# EAGLE board ranback_top (EAGLE 9.6.2)
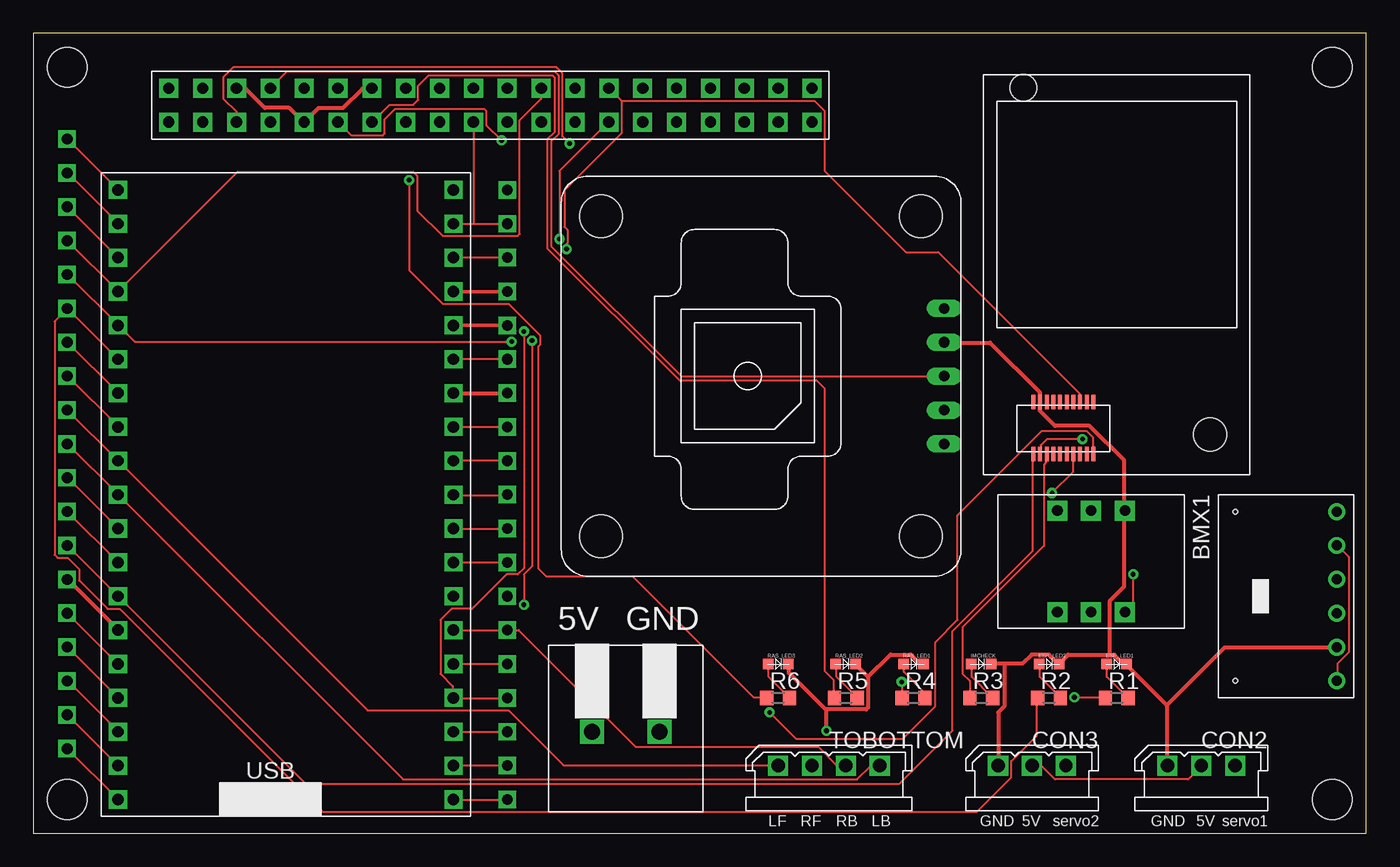
[diagram p0: board, top side]
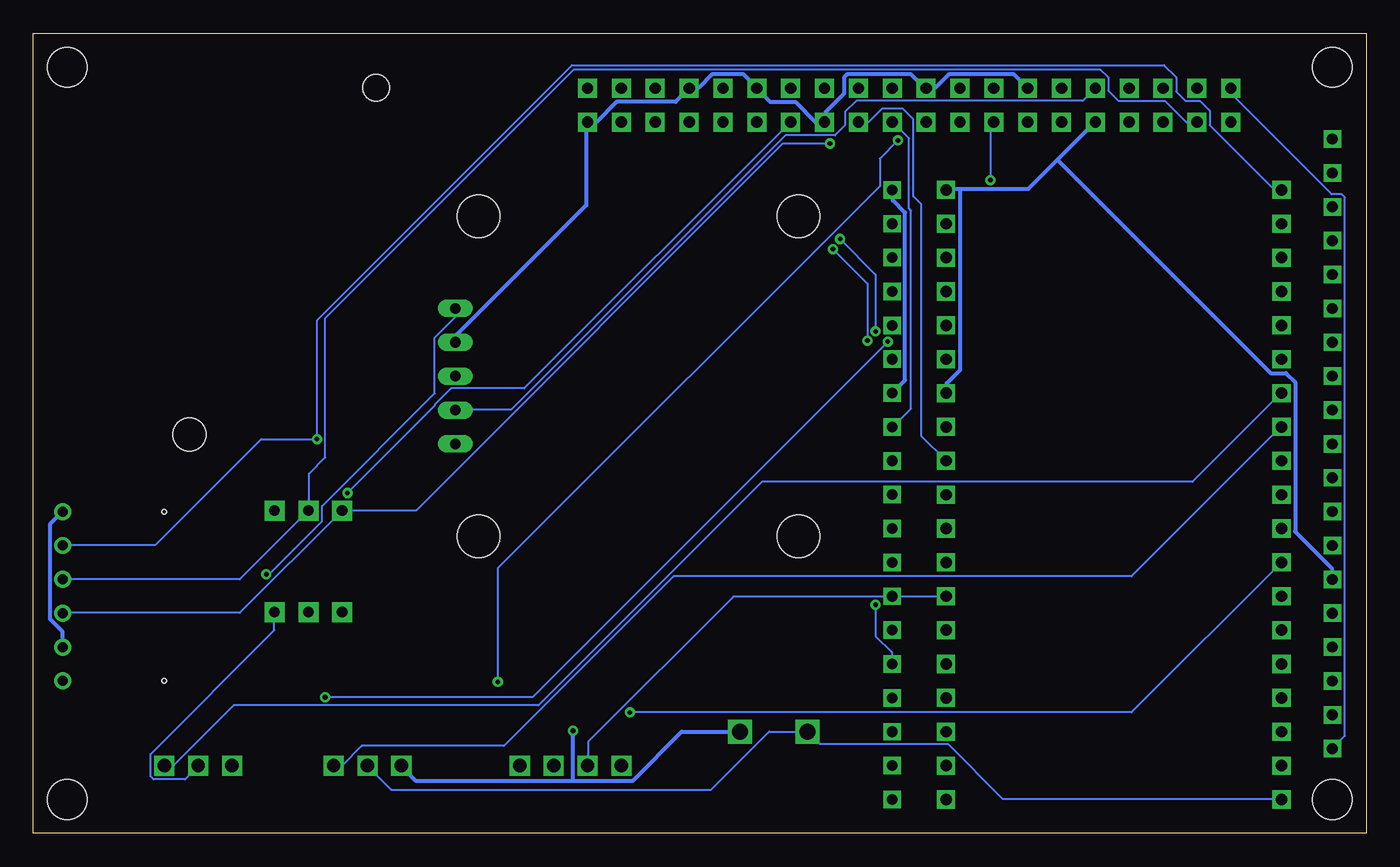
[diagram p1: board, bottom side, seen from below]

Size 100 x 60 mm. Coordinates in mm from the lower left corner, seen from the top.
Outline: 0,0 100,0 100,60 0,60 0,0
Copper layers (1*16): Top 0.035mm / dielectric 1.5mm / Bottom 0.035mm
Design rules "PCBGoGo": minimum track width 6mil, minimum drill 0.2mm, track to track 6mil, track to pad 6mil, pad to pad 6mil, via to via 6mil, smd to smd 6mil, copper to edge 0.2mm, drill to drill 6mil, minimum pad ring 10mil, minimum via ring 8mil, stop-mask expansion 4mil, vias tented up to drill 0mil, thermal gap 10mil
Net classes: 1 esp: width 0.254 mm, drill 0.127 mm, clearance 0.025 mm; 2 GND_+12V: width 0.305 mm
Holes 3 mm at 2.54,2.54 2.54,57.46 97.46,57.46 97.46,2.54

## Footprints (pad centres in the part's own frame; a part is rotated, then mirrored left to right if it is on the bottom)
BMX055 = drill 0.8 pad 1.5 square: 3V3 8.81,-9.53; GND 1.19,-4.46; SCL 1.19,-9.53; SDA 1.19,-7; VCC 8.81,-4.46; VCCIO 8.81,-7
2.5_MINI-SPOX_3PIN = drill 1 square: 1 -1.27,0; 2 1.27,0; 3 3.81,0
OSXX1608C1A = smd 0.8 x 0.8: AN -0.75,0; CT 0.75,0
AE-GYSFDMAXB = drill 0.8 long: P1 13.716,5.08; P2 13.716,2.54; P3 13.716,0; P4 13.716,-2.54; P5 13.716,-5.08 | hole 3.2: -12,12; 12,12; 12,-12; -12,-12
IM920C = smd 0.3 x 1.1: $P1 -1.75,-13.45; $P2 -1.75,-9.55; $P3 -2.25,-13.45; $P4 -2.25,-9.55; $P5 -2.75,-13.45; $P6 -2.75,-9.55; $P7 -3.25,-13.45; $P8 -3.25,-9.55; $P9 -3.75,-13.45; $P10 -3.75,-9.55; $P11 -4.25,-13.45; $P12 -4.25,-9.55; $P13 -4.75,-13.45; $P14 -4.75,-9.55; $P15 -5.25,-13.45; $P16 -5.25,-9.55; $P17 -5.75,-13.45; $P18 -5.75,-9.55; $P19 -6.25,-13.45; $P20 -6.25,-9.55 | hole 2.5: 7,-12 | hole 2: -7,14
19_2.54 = drill 0.8 pad 1.27 square: 1 0,12.7; 2 0,10.16; 3 0,7.62; 4 0,5.08; 5 0,2.54; 6 0,0; 7 0,-2.54; 8 0,-5.08; 9 0,-7.62; 10 0,-10.16; 11 0,-12.7; 12 0,-15.24; 13 0,-17.78; 14 0,-20.32; 15 0,-22.86; 16 0,-25.4; 17 0,-27.94; 18 0,-30.48; 19 0,-33.02
R0603 = smd 1 x 1.1: 1 -0.85,0; 2 0.85,0
RASPBERRYPI4B = drill 0.85 pad 1.422 square: 3V3_1 -2.54,-2.54; 3V3_2 -2.54,-22.86; 5V_1 0,-2.54; 5V_2 0,-5.08; GND_1 0,-7.62; GND_2 0,-17.78; GND_3 0,-25.4; GND_4 0,-38.1; GND_5 0,-43.18; GND_6 -2.54,-12.7; GND_7 -2.54,-33.02; GND_8 -2.54,-50.8; GPIO0 -2.54,-35.56; GPIO1 0,-35.56; GPIO2 -2.54,-5.08; GPIO3 -2.54,-7.62; GPIO4 -2.54,-10.16; GPIO5 -2.54,-38.1; GPIO6 -2.54,-40.64; GPIO7 0,-33.02; GPIO8 0,-30.48; GPIO9 -2.54,-27.94; GPIO10 -2.54,-25.4; GPIO11 -2.54,-30.48; GPIO12 0,-40.64; GPIO13 -2.54,-43.18; GPIO14 0,-10.16; GPIO15 0,-12.7; GPIO16 0,-45.72; GPIO17 -2.54,-15.24; GPIO18 0,-15.24; GPIO19 -2.54,-45.72; GPIO20 0,-48.26; GPIO21 0,-50.8; GPIO22 -2.54,-20.32; GPIO23 0,-20.32; GPIO24 0,-22.86; GPIO25 0,-27.94; GPIO26 -2.54,-48.26; GPIO27 -2.54,-17.78
TERMINAL_SLOPED_2PIN = drill 1.2 square: 1 -2.54,0; 2 2.54,0
2.5_MINI-SPOX_4PIN = drill 1 square: P$1 -1.27,0; P$2 6.35,0; P$3 1.27,0; P$4 3.81,0
ESP32 = drill 0.85 square: 3.3V 1.27,46.99; 5V 1.27,1.27; EN 1.27,44.45; GND1 1.27,13.97; GND2 26.44,46.99; GND3 26.44,31.75; GPIO0 26.44,13.97; GPIO2 26.44,11.43; GPIO4 26.44,16.51; GPIO5 26.44,24.13; GPIO6 26.44,1.27; GPIO7 26.44,3.81; GPIO8 26.44,6.35; GPIO9 1.27,8.89; GPIO10 1.27,6.35; GPIO11 1.27,3.81; GPIO12 1.27,16.51; GPIO13 1.27,11.43; GPIO14 1.27,19.05; GPIO15 26.44,8.89; GPIO16 26.44,19.05; GPIO17 26.44,21.59; GPIO18 26.44,26.67; GPIO19 26.44,29.21; GPIO21 26.44,34.29; GPIO22 26.44,41.91; GPIO23 26.44,44.45; GPIO25 1.27,26.67; GPIO26 1.27,24.13; GPIO27 1.27,21.59; GPIO32 1.27,31.75; GPIO33 1.27,29.21; GPIO34 1.27,36.83; GPIO35 1.27,34.29; GPIO36 1.27,41.91; GPIO39 1.27,39.37; RX 26.44,36.83; TX 26.44,39.37
GY-BMP280-FOOTPRINT = drill 0.75 pad 1.27: CSB 11.43,0; GND 3.81,0; SCK 6.35,0; SDI 8.89,0; SDO 13.97,0; VCC 1.27,0 | hole 0.35: 1.27,7.62; 13.97,7.62

## Placement (x,y rotation side)
BMX1  BMX055  [BMX055]  86.36,25.4 270 top
CON2  [2.5_MINI-SPOX_3PIN]  86.36,5.08 0 top
CON3  [2.5_MINI-SPOX_3PIN]  73.66,5.08 0 top
ESP_LED1  OSXX1608C1A  [OSXX1608C1A]  81.28,12.7 0 top
ESP_LED2  OSXX1608C1A  [OSXX1608C1A]  76.2,12.7 0 top
GPS  AE-GYSFDMAXB  [AE-GYSFDMAXB]  54.61,34.29 0 top
IM  IM920C  [IM920C]  81.28,41.91 0 top
IMCHECK  OSXX1608C1A  [OSXX1608C1A]  71.12,12.7 0 top
PIN_L  [19_2.54]  2.54,39.37 0 top
PIN_R  [19_2.54]  35.56,35.56 0 top
R1  1.5k  [R0603]  81.28,10.16 0 top
R2  1.5k  [R0603]  76.2,10.16 0 top
R3  1.5k  [R0603]  71.12,10.16 0 top
R4  1.5k  [R0603]  66.04,10.16 0 top
R5  1.5k  [R0603]  60.96,10.16 0 top
R6  1.5k  [R0603]  55.88,10.16 0 top
RAS_LED1  OSXX1608C1A  [OSXX1608C1A]  66.04,12.7 0 top
RAS_LED2  OSXX1608C1A  [OSXX1608C1A]  60.96,12.7 0 top
RAS_LED3  OSXX1608C1A  [OSXX1608C1A]  55.88,12.7 0 top
RASPBERRYPI_4B  [RASPBERRYPI4B]  7.62,55.88 90 top
TM5  [TERMINAL_SLOPED_2PIN]  44.45,7.62 0 top
TOBOTTOM  [2.5_MINI-SPOX_4PIN]  57.15,5.08 0 top
U$2  ESP32  [ESP32]  5.08,1.27 0 top
U$9  GY-BPM280  [GY-BMP280-FOOTPRINT]  97.79,10.16 90 top

## Library data of the parts
BMX1 = BMX055
CON2 CON3 TOBOTTOM = Connector
ESP_LED1 ESP_LED2 IMCHECK RAS_LED1-RAS_LED3 = ChipLED
GPS = AE-GYSFDMAXB
IM = IM920
PIN_L PIN_R = JumperPins
R1-R6 = rcl; SPICEPREFIX: R
RASPBERRYPI_4B = RASPBERRYPI4B
TM5 = TerminalBrock
U$2 = ESP32_dev
U$9 = BMP280

## Nets
3V3: BMX1.3V3
+3V3: IM.$P17 PIN_L.1 U$2.3.3V U$9.CSB U$9.VCC
+5V: BMX1.VCC CON2.2 CON3.2 GPS.P1 PIN_L.19 RASPBERRYPI_4B.5V_1 TM5.1 U$2.5V
BB_SCL: BMX1.SCL RASPBERRYPI_4B.GPIO3 U$9.SCK
BB_SDA: BMX1.SDA RASPBERRYPI_4B.GPIO2 U$9.SDI
EN: PIN_L.2 U$2.EN
GND [GND_+12V]: BMX1.GND CON2.1 CON3.1 ESP_LED1.CT ESP_LED2.CT GPS.P2 IM.$P18 IMCHECK.CT PIN_L.14 PIN_R.1 PIN_R.7 RAS_LED1.CT RAS_LED2.CT RAS_LED3.CT RASPBERRYPI_4B.GND_1 RASPBERRYPI_4B.GND_2 RASPBERRYPI_4B.GND_3 RASPBERRYPI_4B.GND_4 RASPBERRYPI_4B.GND_5 RASPBERRYPI_4B.GND_6 RASPBERRYPI_4B.GND_7 RASPBERRYPI_4B.GND_8 TM5.2 U$2.GND1 U$2.GND2 U$2.GND3 U$9.GND U$9.SDO
GPS_RX: GPS.P3 RASPBERRYPI_4B.GPIO14
GPS_TX: GPS.P4 RASPBERRYPI_4B.GPIO15
IM_BUSY: IM.$P1 PIN_L.12 U$2.GPIO14
IM_RESET: IM.$P19 PIN_L.13 U$2.GPIO12
IM_RX: IM.$P6 PIN_R.15 RASPBERRYPI_4B.GPIO1 U$2.GPIO2
IM_TX: IM.$P7 PIN_R.16 RASPBERRYPI_4B.GPIO0 U$2.GPIO15
IO5: PIN_R.10 U$2.GPIO5
IO6: PIN_R.19 U$2.GPIO6
IO7: PIN_R.18 U$2.GPIO7
IO8: PIN_R.17 U$2.GPIO8
IO9: PIN_L.16 U$2.GPIO9
IO10: PIN_L.17 U$2.GPIO10
IO11: PIN_L.18 U$2.GPIO11
IO13: PIN_L.15 U$2.GPIO13
IO27: PIN_L.11 U$2.GPIO27
LED1: PIN_L.5 R1.1 U$2.GPIO34
LED2: PIN_L.6 R2.1 U$2.GPIO35
LED3: IM.$P15 R3.1
LED4: R4.1 RASPBERRYPI_4B.GPIO17
LED5: R5.1 RASPBERRYPI_4B.GPIO27
LED6: R6.1 RASPBERRYPI_4B.GPIO22
MD_LB: PIN_L.10 TOBOTTOM.P$2 U$2.GPIO26
MD_LF: PIN_L.9 TOBOTTOM.P$1 U$2.GPIO25
MD_RB: PIN_R.14 TOBOTTOM.P$4 U$2.GPIO0
MD_RF: PIN_R.13 TOBOTTOM.P$3 U$2.GPIO4
N$1: ESP_LED1.AN R1.2
N$2: ESP_LED2.AN R2.2
N$3: IMCHECK.AN R3.2
N$4: R4.2 RAS_LED1.AN
N$5: R5.2 RAS_LED2.AN
N$6: R6.2 RAS_LED3.AN
RP_MISO: PIN_R.8 RASPBERRYPI_4B.GPIO9 U$2.GPIO19
RP_MOSI: PIN_R.2 RASPBERRYPI_4B.GPIO10 U$2.GPIO23
RP_RX: PIN_R.11 U$2.GPIO17
RP_SCK: PIN_R.9 RASPBERRYPI_4B.GPIO11 U$2.GPIO18
RP_SS: PIN_L.4 RASPBERRYPI_4B.GPIO8 U$2.GPIO39
RP_TX: PIN_R.12 U$2.GPIO16
RXD [esp]: PIN_R.4 U$2.TX
SCL: PIN_R.3 U$2.GPIO22
SDA: PIN_R.6 U$2.GPIO21
SENSOR_VP: PIN_L.3 U$2.GPIO36
SERVO1: CON2.3 PIN_L.7 U$2.GPIO32
SERVO2: CON3.3 PIN_L.8 U$2.GPIO33
TXD [esp]: PIN_R.5 U$2.RX
VCCIO: BMX1.VCCIO

## Tracks (layer width: path | path; a pad name or v marks a point on that pad's centre or on a via)
+3V3  (via drill 0.35)
  Top 0.152: PIN_L.1 2.59,52.05 6.33,48.31 U$2.3.3V | v78.72,29.57 76.05,29.57 75.59,29.11 75.59,28.5 IM.$P17 | U$9.VCC 97.84,11.43 97.84,12.72 98.68,13.56 98.68,20.73 97.84,21.57 U$9.CSB
  Bottom 0.152: U$9.CSB 97.77,21.64 90.83,21.64 82.91,29.57 v78.72,29.57 78.72,38.48 59.59,57.61 15.16,57.61 14.25,56.69 14.25,55.63 13.56,54.94 12.5,54.94 11.73,54.18 11.73,53.11 6.93,48.31 6.4,48.31 U$2.3.3V
+5V  (via drill 0.35)
  Top 0.152: PIN_L.19 2.59,6.33 6.33,2.59 U$2.5V | v82.53,19.43 82.53,17.22 81.92,16.61 BMX1.VCC | CON3.2 74.98,5.03 75.67,5.03 76.66,4.04 86.64,4.04 87.63,5.03 CON2.2
  Bottom 0.152: RASPBERRYPI_4B.5V_1 10.13,55.85 10.13,55.47 2.59,47.93 1.83,47.93 1.6,47.7 1.6,7.32 2.52,6.4 PIN_L.19 | v82.53,19.43 82.3,19.43 78.33,23.39 78.33,24.54 69.88,32.99 69.88,37.19 68.35,38.71 68.35,39.32 GPS.P1 | CON3.2 74.91,5.03 73.15,3.28 49.15,3.28 44.81,7.62 TM5.1 41,6.71 31.39,6.71 27.28,2.59 6.4,2.59 U$2.5V | BMX1.VCC 81.92,16.54 81.92,15.24 91.21,5.94 91.21,4.27 90.98,4.04 88.62,4.04 87.63,5.03 CON2.2
BB_SCL  (via drill 0.35)
  Top 0.152: RASPBERRYPI_4B.GPIO3 15.24,54.1 14.25,55.09 14.25,56.69 15.01,57.45 39.24,57.45 39.7,57 39.7,52.27 v40.23,51.74
  Bottom 0.152: U$9.SCK 97.77,16.54 84.51,16.54 76.89,24.16 BMX1.SCL 76.81,24.23 71.25,24.23 43.74,51.74 v40.23,51.74
BB_SDA
  Bottom 0.152: U$9.SDI 84.51,19.05 79.4,24.16 BMX1.SDA 79.32,24.23 79.32,26.98 78.11,28.19 78.11,38.63 59.44,57.3 19.96,57.3 19.36,56.69 19.36,55.7 18.59,54.94 15.09,54.94 13.49,53.34 RASPBERRYPI_4B.GPIO2
EN
  Top 0.152: PIN_L.2 2.59,49.53 6.4,45.72 U$2.EN
GND  (via drill 0.35)
  Top 0.305: GPS.P2 68.35,36.8 71.78,36.8 75.51,33.07 75.51,32.38 IM.$P18 75.51,32.23 75.51,31.7 76.66,30.56 79.25,30.56 81.84,27.96 81.84,24.31 BMX1.GND 81.84,24.16 81.84,18.52 80.77,17.45 80.77,13.41 | 59.44,9.3 56.69,12.04 56.69,12.65 RAS_LED3.CT | 59.44,9.3 62.48,9.3 62.64,9.45 62.64,11.73 | 62.64,11.73 61.72,12.65 RAS_LED2.CT | 62.64,11.73 64.31,13.41 65.84,13.41 66.52,12.72 66.75,12.72 RAS_LED1.CT | 72.85,12.72 74.22,12.72 74.91,13.41 76.2,13.41 76.89,12.72 ESP_LED2.CT 77.04,12.8 77.65,13.41 80.77,13.41 | 72.85,12.72 71.93,12.72 IMCHECK.CT | 80.77,13.41 81.08,13.41 81.76,12.72 81.99,12.72 ESP_LED1.CT 82.07,12.57 85.04,9.6 | CON3.1 72.39,9.07 72.85,9.53 72.85,12.72 | 85.04,9.6 85.04,5.11 CON2.1 | v59.51,7.7 59.51,9.22 59.44,9.3 | 85.04,9.6 89.38,13.95 97.77,13.95 U$9.GND | PIN_R.7 35.51,32.99 31.55,32.99 U$2.GND3 | PIN_L.14 2.59,19.05 6.4,15.24 U$2.GND1 | RASPBERRYPI_4B.GND_1 15.24,55.85 15.93,55.85 17.37,54.41 19.2,54.41 20.27,53.34 RASPBERRYPI_4B.GND_6 20.42,53.42 21.41,54.41 23.24,54.41 24.69,55.85 25.38,55.85 RASPBERRYPI_4B.GND_2
  Bottom 0.305: U$9.SDO 98.75,23.16 98.75,16.08 97.84,15.16 97.84,14.02 U$9.GND | TM5.2 51.36,7.62 55.02,3.96 59.51,3.96 | 59.51,3.96 71.32,3.96 72.39,5.03 CON3.1 | 59.51,3.96 v59.51,7.7 | PIN_R.7 34.59,33.98 34.59,46.56 35.51,47.47 35.51,48.23 PIN_R.1 | 30.48,48.31 25.38,48.31 23.16,50.52 | 30.48,48.31 31.47,48.31 U$2.GND2 | 23.16,50.52 20.34,53.34 RASPBERRYPI_4B.GND_6 | RASPBERRYPI_4B.GND_2 26.44,56.92 31.32,56.92 32.31,55.93 32.99,55.93 RASPBERRYPI_4B.GND_3 33.15,55.93 34.14,56.92 38.94,56.92 39.17,56.69 39.17,55.47 40.54,54.1 40.54,53.42 RASPBERRYPI_4B.GND_7 41.3,53.34 42.82,54.86 44.73,54.86 45.72,55.85 RASPBERRYPI_4B.GND_4 45.8,56.01 46.71,56.92 49.07,56.92 50.06,55.93 50.75,55.93 RASPBERRYPI_4B.GND_5 51.82,54.86 56.24,54.86 57.76,53.34 RASPBERRYPI_4B.GND_8 58.52,53.26 58.52,47.09 68.28,37.34 68.28,36.88 GPS.P2 | 23.16,50.52 7.16,34.52 6.02,34.52 5.33,33.83 5.33,22.63 2.59,19.89 2.59,19.05 PIN_L.14 | 30.48,48.31 30.48,34.75 31.47,33.76 31.47,33.07 U$2.GND3
GPS_RX
  Top 0.152: GPS.P3 48.62,34.29 38.86,44.04 38.86,51.89 39.4,52.43 39.4,56.84 39.09,57.15 19.05,57.15 RASPBERRYPI_4B.GPIO14
GPS_TX
  Bottom 0.152: RASPBERRYPI_4B.GPIO15 21.26,54.94 38.25,54.94 39.09,54.1 39.09,53.11 39.85,52.35 43.59,52.35 64.16,31.77 68.28,31.77 GPS.P4
IM_BUSY  (via drill 0.35)
  Top 0.152: v55.24,9.07 57.23,7.09 65.23,7.09 67.67,9.53 67.67,14.33 69.34,16 69.34,23.85 75.67,30.18 79.02,30.18 79.48,29.72 79.48,28.5 IM.$P1 | U$2.GPIO14 PIN_L.12
  Bottom 0.152: v55.24,9.07 17.6,9.07 U$2.GPIO14
IM_RESET
  Top 0.152: IM.$P19 74.98,28.42 74.98,21.18 68.96,15.16 68.96,7.7 65,3.73 20.42,3.73 6.4,17.75 U$2.GPIO12 6.33,17.83 2.59,21.57 PIN_L.13
IM_RX  (via drill 0.35)
  Top 0.152: PIN_R.15 35.51,12.72 31.55,12.72 U$2.GPIO2 | 44.12,54.94 58.6,54.94 59.36,54.18 59.36,49.68 65.46,43.59 67.89,43.59 78.49,32.99 78.49,32.38 IM.$P6 | RASPBERRYPI_4B.GPIO1 44.12,54.94 | v36.8,17.14 36.8,19.43 37.41,20.04 v37.41,36.96 | v40.01,43.81 40.01,44.2 40.08,44.27 40.08,45.26 39.85,45.49 39.85,48.23 44.12,52.5 44.12,54.94
  Bottom 0.152: v36.8,17.14 36.8,14.78 35.59,13.56 35.59,12.72 PIN_R.15 | v37.41,36.96 37.41,41.22 v40.01,43.81
IM_TX  (via drill 0.35)
  Top 0.152: PIN_R.16 35.51,10.13 31.55,10.13 U$2.GPIO15 31.47,10.21 31.47,11.05 30.56,11.96 30.56,16 31.39,16.84 32.92,16.84 35.51,19.43 36.35,19.43 36.8,19.89 v36.8,37.64 | v76.43,25.53 78.03,27.13 78.03,28.42 IM.$P7 | v39.47,44.58 39.47,49.68 43.13,53.34 RASPBERRYPI_4B.GPIO0
  Bottom 0.152: v76.43,25.53 69.88,32.08 69.88,32.16 68.66,33.38 63.17,33.38 43.2,53.34 RASPBERRYPI_4B.GPIO0 | v36.8,37.64 36.8,41.91 v39.47,44.58
IO5
  Top 0.152: PIN_R.10 35.51,25.38 31.55,25.38 U$2.GPIO5
IO6
  Top 0.152: PIN_R.19 35.51,2.52 31.55,2.52 U$2.GPIO6
IO7
  Top 0.152: PIN_R.18 35.51,5.11 31.55,5.11 U$2.GPIO7
IO8
  Top 0.152: U$2.GPIO8 PIN_R.17
IO9
  Top 0.152: PIN_L.16 2.59,13.95 6.33,10.21 U$2.GPIO9
IO10
  Top 0.152: PIN_L.17 2.59,11.43 6.4,7.62 U$2.GPIO10
IO11
  Top 0.152: U$2.GPIO11 PIN_L.18
IO13
  Top 0.152: U$2.GPIO13 PIN_L.15
IO27
  Top 0.152: PIN_L.11 2.59,26.67 6.4,22.86 U$2.GPIO27
LED1  (via drill 0.35)
  Top 0.152: v78.11,10.21 80.39,10.21 R1.1 | v35.89,36.88 7.62,36.88 6.4,38.1 | 6.4,38.1 2.59,41.91 PIN_L.5 | 6.4,38.1 U$2.GPIO34
  Bottom 0.152: v78.11,10.21 62.56,10.21 v35.89,36.88
LED2
  Top 0.152: R2.1 75.29,10.13 75.29,7.32 73.38,5.41 73.38,4.19 70.79,1.6 21.72,1.6 6.48,16.84 5.56,16.84 3.43,18.97 3.43,19.81 2.59,20.65 1.83,20.65 1.6,20.88 1.6,38.41 2.52,39.32 PIN_L.6 U$2.GPIO35
LED3
  Top 0.152: R3.1 70.26,10.21 70.26,11.43 69.72,11.96 69.72,15.47 75.82,21.57 75.82,27.66 75.97,27.81 75.97,28.42 IM.$P15
LED4  (via drill 0.35)
  Top 0.152: v65.15,11.35 65.15,10.21 R4.1 | v35.13,51.97 33.98,53.11 33.98,54.18 33.83,54.33 27.13,54.33 26.36,53.57 26.36,52.5 26.21,52.35 23.85,52.35 RASPBERRYPI_4B.GPIO17
  Bottom 0.152: v65.15,11.35 65.15,19.89 36.5,48.54 36.5,50.6 v35.13,51.97
LED5
  Top 0.152: R5.1 60.05,10.21 60.05,11.51 59.36,12.19 59.36,33.38 58.75,33.98 48.46,33.98 38.56,43.89 38.56,52.05 39.09,52.58 39.09,56.69 38.94,56.84 29.64,56.84 28.88,56.08 28.88,55.02 28.5,54.63 26.75,54.63 25.45,53.34 RASPBERRYPI_4B.GPIO27
LED6  (via drill 0.35)
  Top 0.152: v28.19,49 28.19,42.22 30.71,39.7 35.66,39.7 38.02,37.34 38.02,36.65 37.87,36.5 37.87,19.89 38.48,19.28 44.96,19.28 54.03,10.21 55.02,10.21 R6.1
  Bottom 0.152: v28.19,49 28.19,53.11 27.96,53.34 RASPBERRYPI_4B.GPIO22
MD_LB
  Top 0.152: PIN_L.10 2.59,29.18 6.33,25.45 U$2.GPIO26 6.4,25.38 27.74,4.04 61.8,4.04 62.79,5.03 63.48,5.03 TOBOTTOM.P$2
MD_LF
  Top 0.152: PIN_L.9 U$2.GPIO25 25.07,9.22 35.66,9.22 39.78,5.11 55.85,5.11 TOBOTTOM.P$1
MD_RB
  Top 0.152: U$2.GPIO0 PIN_R.14 36.42,15.24 45.19,6.48 58.9,6.48 60.27,5.11 60.96,5.11 TOBOTTOM.P$4
MD_RF
  Bottom 0.152: U$2.GPIO4 31.55,17.75 35.51,17.75 PIN_R.13 35.59,17.75 47.47,17.75 58.37,6.86 58.37,5.11 TOBOTTOM.P$3
N$1
  Top 0.152: ESP_LED1.AN 80.54,12.65 80.54,11.73 82.07,10.21 R1.2
N$2
  Top 0.152: ESP_LED2.AN 75.51,12.65 75.51,11.73 77.04,10.21 R2.2
N$3
  Top 0.152: IMCHECK.AN 70.41,12.65 70.41,11.73 71.93,10.21 R3.2
N$4
  Top 0.152: RAS_LED1.AN 65.3,12.65 65.3,12.12 66.83,10.59 66.83,10.21 R4.2
N$5
  Top 0.152: RAS_LED2.AN 60.27,12.65 60.27,11.73 61.8,10.21 R5.2
N$6
  Top 0.152: RAS_LED3.AN 55.17,12.65 55.17,11.73 56.69,10.21 R6.2
RP_MISO
  Top 0.152: U$2.GPIO19 PIN_R.8
  Bottom 0.152: RASPBERRYPI_4B.GPIO9 35.51,53.34 34.29,52.12 34.29,46.86 34.14,46.71 34.14,31.85 35.51,30.48 PIN_R.8
RP_MOSI
  Top 0.152: U$2.GPIO23 33.07,45.72 | 33.07,45.72 PIN_R.2 | 33.07,45.72 33.07,53.34 RASPBERRYPI_4B.GPIO10
RP_RX
  Top 0.152: U$2.GPIO17 PIN_R.11
RP_SCK
  Top 0.152: PIN_R.9 35.51,27.96 31.55,27.96 U$2.GPIO18
  Bottom 0.152: RASPBERRYPI_4B.GPIO11 37.34,53.34 36.35,54.33 34.75,54.33 33.98,53.57 33.98,47.78 33.38,47.17 33.38,29.79 31.55,27.96 U$2.GPIO18
RP_SS
  Top 0.152: PIN_L.4 2.59,44.42 6.33,40.69 U$2.GPIO39 15.32,49.61 28.5,49.61 28.8,49.3 28.8,46.71 30.71,44.81 36.35,44.81 36.5,44.96 36.5,53.49 38.1,55.09 RASPBERRYPI_4B.GPIO8
RP_TX
  Top 0.152: PIN_R.12 35.51,20.34 31.55,20.34 U$2.GPIO16
RXD
  Top 0.254: PIN_R.4 35.51,40.62 31.55,40.62 U$2.TX
SCL
  Top 0.152: PIN_R.3 35.51,43.2 31.55,43.2 U$2.GPIO22
SDA
  Top 0.152: PIN_R.6 35.51,35.59 31.55,35.59 U$2.GPIO21
SENSOR_VP
  Top 0.152: U$2.GPIO36 PIN_L.3
SERVO1
  Top 0.152: PIN_L.7 2.59,36.8 6.33,33.07 U$2.GPIO32
  Bottom 0.152: CON2.3 90.14,5.11 89.46,5.11 84.96,9.6 62.1,9.6 45.34,26.36 13.03,26.36 6.4,32.99 U$2.GPIO32
SERVO2
  Top 0.152: PIN_L.8 2.59,34.29 6.4,30.48 U$2.GPIO33
  Bottom 0.152: CON3.3 77.42,5.11 76.81,5.11 75.36,6.55 64.69,6.55 51.97,19.28 17.6,19.28 6.4,30.48 U$2.GPIO33
TXD
  Top 0.254: U$2.RX PIN_R.5

## Text on the board
tPlace: 5V | GND | LF | RF | RB | LB | GND | 5V | servo2 | GND | 5V | servo1